# Altium PCB PCB.PcbDoc
Units mm, origin at the board's own origin, x right, y up, seen from the top; angles counter-clockwise.
Board outline 100 x 150 mm, 2 copper layers (Top Layer, Bottom Layer); 62 components, 49 nets, 227 pads, 0 vias.
Unrouted connection lines stored in the file: 11.
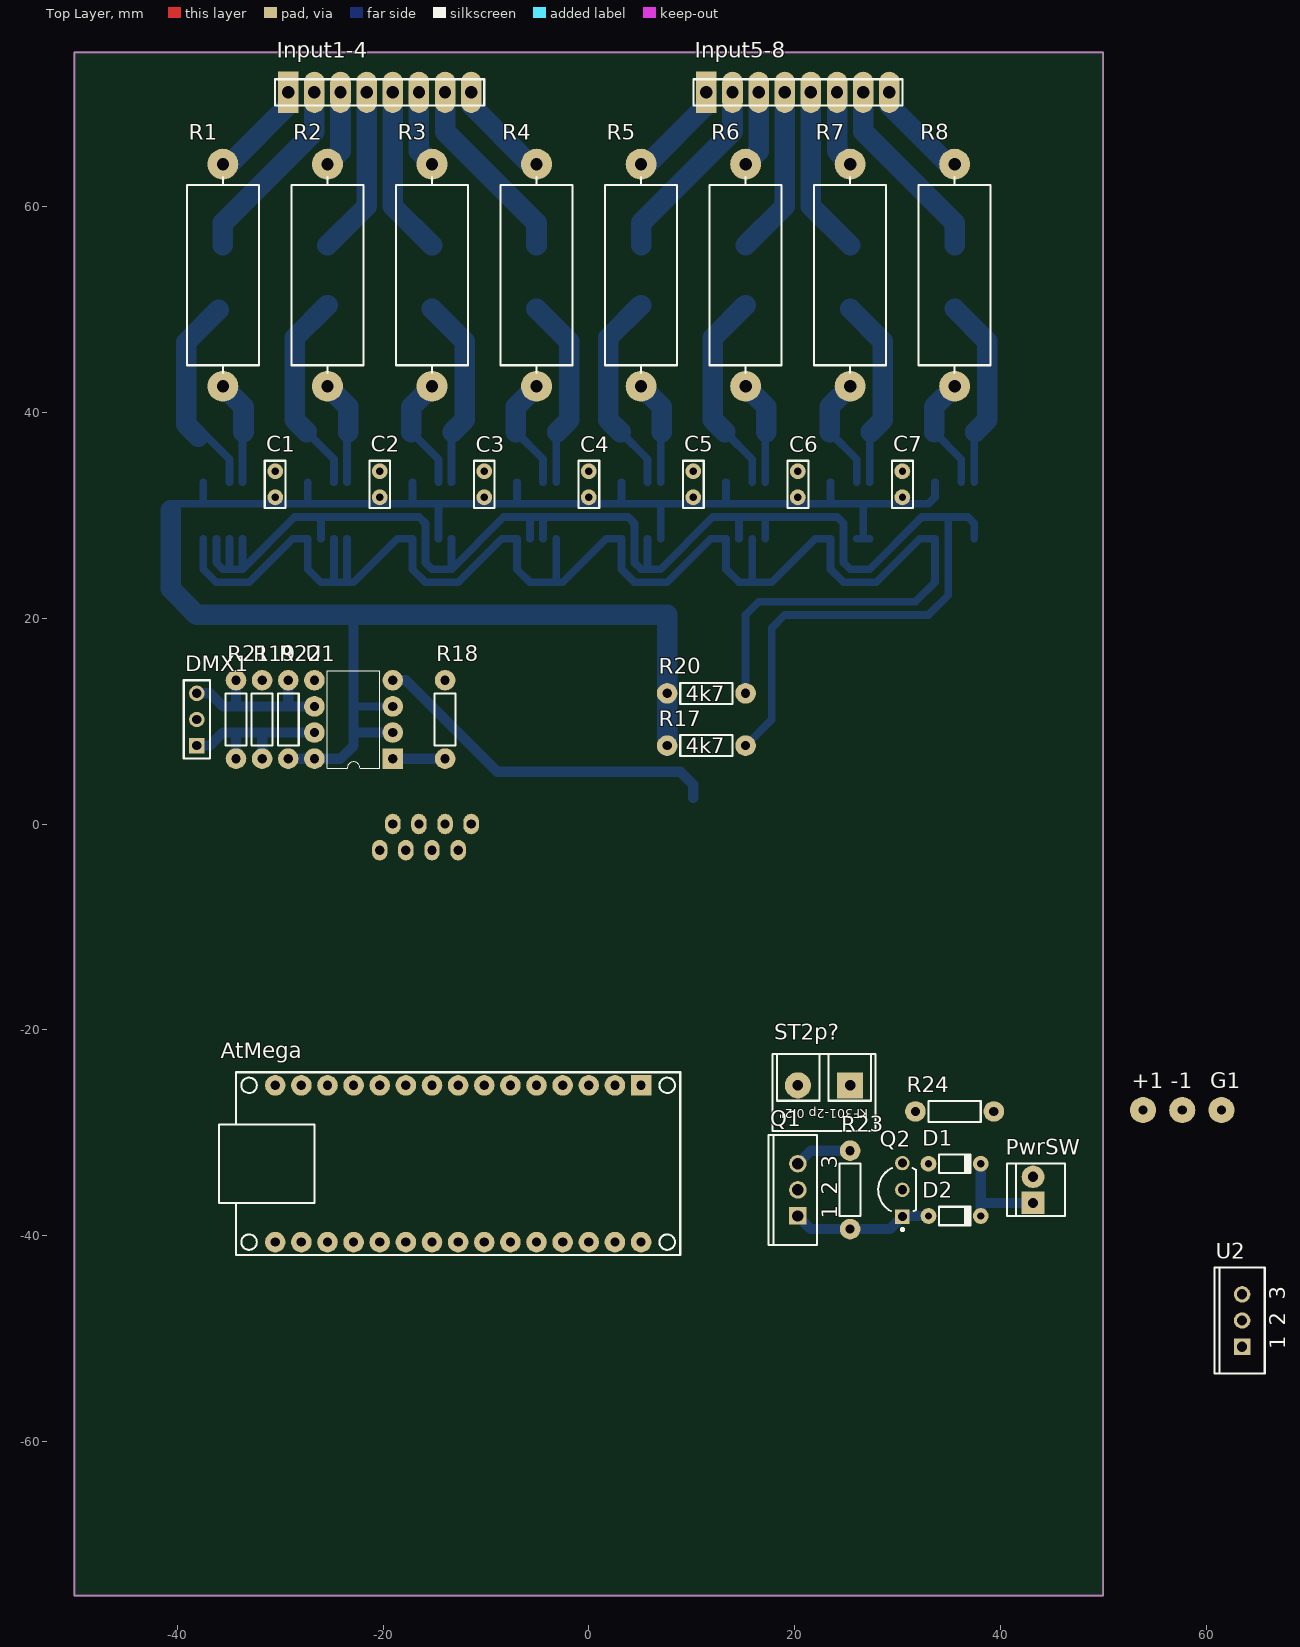
[diagram p0: Top Layer view]
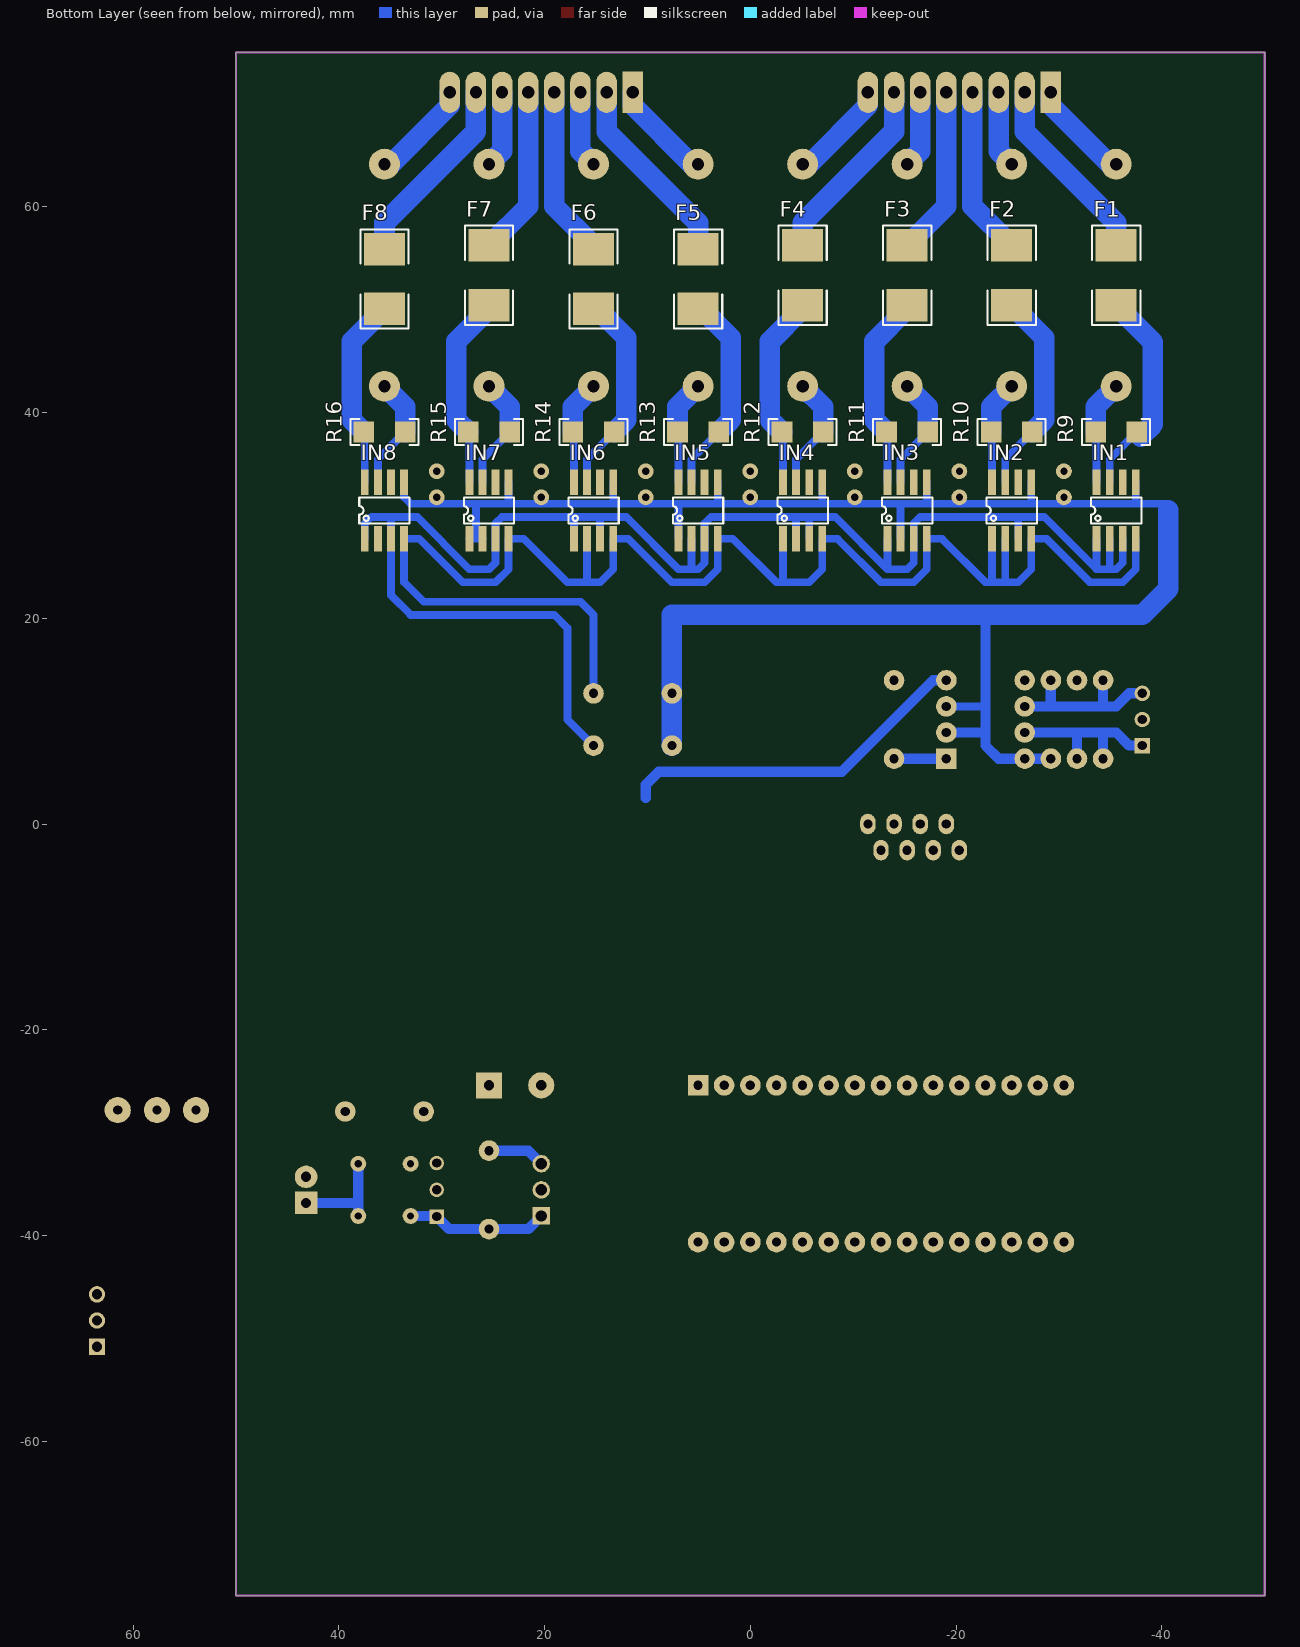
[diagram p1: Bottom Layer view, seen from below]

## Layer stack, top to bottom
Top Solder: solder mask 0.0102, Solder Resist, Dk 3.5
Top Layer: signal copper 0.0356
Dielectric 1: dielectric 0.32, FR-4, Dk 4.8
Bottom Layer: signal copper 0.0356
Bottom Solder: solder mask 0.0102, Solder Resist, Dk 3.5

## Board outline
-50,75 -50,-75 50,-75 50,75

## Design rules (kind name [scope] priority, off if disabled: settings)
BoardOutlineClearance [All] p1: gap=0 ignorepadtopadclearanceinfootprint=FALSE
Clearance [All] p1: gap=0.35 ignorepadtopadclearanceinfootprint=TRUE
ComponentClearance ComponentClearance_1 [(InPolygon AND InComponent('P1'))] p1: gap=0 collisioncheckmode=3 verticalgap=0.254 showdistances=FALSE
ComponentClearance [All] p2: gap=0 collisioncheckmode=3 verticalgap=0.254 showdistances=FALSE
HoleSize [All] p1: absolutevalues=TRUE maxlimit=3.81 minlimit=0.711 maxpercent=80.000 minpercent=20.000
HoleToHoleClearance [All] p1: gap=0.762 allowstackedmicrovias=TRUE
MinimumSolderMaskSliver [All] p1 off: minsoldermaskwidth=0.254
MinimumSolderMaskSliver SilkscreenOverComponentPads [All] p2 off: minsoldermaskwidth=0.254
PasteMaskExpansion [All] p1 off: expansion=0
PlaneConnect [All] p1: planeconnectstyle=Relief reliefexpansion=0.508 reliefentries=4 reliefconductorwidth=0.305 reliefairgap=0.254
PolygonConnect [All] p1: connectstyle=Relief reliefconductorwidth=0.5 reliefentries=4 polygonreliefangle="90 Angle" airgapwidth=0.254
RoutingVias [All] p1: holewidth=0.711 width=1.778 viastyle="Through Hole" minholewidth=0.711 minwidth=1.524 maxholewidth=0.991 maxwidth=2.54
SilkToSilkClearance [All] p1 off: silktosilkclearance=0.254
SolderMaskExpansion [All] p1 off: expansion=0.102
Width [All] p1: maxlimit=2.54 minlimit=0.254 preferedwidth=0.305
23 further rules are at their usual default settings.

## Classes and differential pairs
component class Main: +1 -1 AtMega D1 D2 DMX1 G1 PwrSW Q1 Q2 R17 R18 R19 R20 R21 R22 R23 R24 ST2p? U1 U2
component class INA219Input: C1 C2 C3 C4 C5 C6 C7 F1 F2 F3 F4 F5 F6 F7 F8 IN1 IN2 IN3 IN4 IN5 IN6 IN7 IN8 Input1-4 Input5-8 R1 R2 R3 R4 R5 R6 R7 R8 R9 R10 R11 R12 R13 R14 R15 R16

## Components (designator, comment, footprint, x,y, rotation, side; value= is the part's Value field where it differs from the comment)
+1 "Socket" PIN1 53.87,-27.81 r0 top
-1 "Socket" PIN1 57.68,-27.81 r0 top
AtMega "Arduino Nano" "Arduino Nano" -12.7,-33.02 r180 top
C1 "" "1\" ceramic Radial Cap" -30.48,33.02 r90 top
C2 "" "1\" ceramic Radial Cap" -20.32,33.02 r90 top
C3 "10nF" "1\" ceramic Radial Cap" -10.16,33.02 r90 top
C4 "" "1\" ceramic Radial Cap" 0,33.02 r90 top
C5 "" "1\" ceramic Radial Cap" 10.16,33.02 r90 top
C6 "" "1\" ceramic Radial Cap" 20.32,33.02 r90 top
C7 "10nF" "1\" ceramic Radial Cap" 30.48,33.02 r90 top
D1 "1N4148" "1N4148-AX0.2\"" 35.56,-33.02 r0 top
D2 "1N4148" "1N4148-AX0.2\"" 35.56,-38.1 r0 top
DMX1 "Header 3" HDR1X3 -38.1,7.62 r90 top
F1 "PTC 1812" "0ZCG PTC 1812" -35.56,53.34 r90 bottom
F2 "PTC 1812" "0ZCG PTC 1812" -25.4,53.34 r90 bottom
F3 "PTC 1812" "0ZCG PTC 1812" -15.24,53.34 r90 bottom
F4 "PTC 1812" "0ZCG PTC 1812" -5.08,53.34 r90 bottom
F5 "PTC 1812" "0ZCG PTC 1812" 5.08,52.98 r90 bottom
F6 "PTC 1812" "0ZCG PTC 1812" 15.24,52.98 r90 bottom
F7 "PTC 1812" "0ZCG PTC 1812" 25.4,53.34 r90 bottom
F8 "PTC 1812" "0ZCG PTC 1812" 35.56,52.98 r90 bottom
G1 "Socket" PIN1 61.49,-27.81 r0 top
IN1 "INA219" INA219-D-SOIC -35.56,30.48 r180 bottom
IN2 "INA219" INA219-D-SOIC -25.4,30.48 r180 bottom
IN3 "INA219" INA219-D-SOIC -15.24,30.48 r180 bottom
IN4 "INA219" INA219-D-SOIC -5.08,30.48 r180 bottom
IN5 "INA219" INA219-D-SOIC 5.08,30.48 r180 bottom
IN6 "INA219" INA219-D-SOIC 15.24,30.48 r180 bottom
IN7 "INA219" INA219-D-SOIC 25.4,30.48 r180 bottom
IN8 "INA219" INA219-D-SOIC 35.56,30.48 r180 bottom
Input1-4 "Header 8" HDR1X8 -29.21,71.12 r0 top
Input5-8 "Header 8" HDR1X8 11.43,71.12 r0 top
PwrSW "Molex kk 254 2p" "Molex kk 254 2p" 43.18,-35.56 r90 top
Q1 "SUP65P06-20" TO-220AB 20.32,-35.56 r90 top
Q2 "BC547BRL1G" ONSC-TO-92-3-29-11_AM_BL 30.48,-35.56 r90 top
R1 "20.4" "Axial 0.85 5W" -35.56,53.34 r90 top
R2 "20.4" "Axial 0.85 5W" -25.4,53.34 r90 top
R3 "20.4" "Axial 0.85 5W" -15.24,53.34 r90 top
R4 "20.4" "Axial 0.85 5W" -5.08,53.34 r90 top
R5 "20.4" "Axial 0.85 5W" 5.08,53.34 r90 top
R6 "20.4" "Axial 0.85 5W" 15.24,53.34 r90 top
R7 "20.4" "Axial 0.85 5W" 25.4,53.34 r90 top
R8 "20.4" "Axial 0.85 5W" 35.56,53.34 r90 top
R9 "0.33" "1206 SMD 1/4W" -35.56,38.1 r0 bottom
R10 "0.33" "1206 SMD 1/4W" -25.4,38.1 r0 bottom
R11 "0.33" "1206 SMD 1/4W" -15.24,38.1 r0 bottom
R12 "0.33" "1206 SMD 1/4W" -5.08,38.1 r0 bottom
R13 "0.33" "1206 SMD 1/4W" 5.08,38.1 r0 bottom
R14 "0.33" "1206 SMD 1/4W" 15.24,38.1 r0 bottom
R15 "0.33" "1206 SMD 1/4W" 25.4,38.1 r0 bottom
R16 "0.33" "1206 SMD 1/4W" 35.56,38.1 r0 bottom
R17 "4k7" "Axial 0.3\" 1/4W" 11.43,7.62 r180 top
R18 "10K" "Axial 0.3\" 1/4W" -13.97,10.16 r270 top
R19 "20K" "Axial 0.3\" 1/4W" -31.75,10.16 r90 top
R20 "4k7" "Axial 0.3\" 1/4W" 11.43,12.7 r180 top
R21 "120" "Axial 0.3\" 1/4W" -34.29,10.16 r270 top
R22 "20K" "Axial 0.3\" 1/4W" -29.21,10.16 r90 top
R23 "1M" "Axial 0.3\" 1/4W" 25.4,-35.56 r90 top
R24 "1M" "Axial 0.3\" 1/4W" 35.56,-27.94 r0 top
ST2p? "KF301-2p" "KF301-2p_0.2\"" 22.86,-25.4 r180 top
U1 "MAX485" DIP8 -22.86,10.16 r180 top
U2 "LM7815" 221A-04 63.5,-48.26 r90 top

## Footprints (in the part's own frame and the unit in brackets; to place one, negate y for a bottom-side part, rotate by r counter-clockwise, add the part's x,y. Pads: shape width x height; smd on the part's side, far side on the other; paste and mask are expansions set on the pad)
"0ZCG PTC 1812" [mm] "Bel Fuse PTC in 1812 package from the 0ZCG series"
  rect 3.15x4 smd: 1(-2.9,0) 2(2.9,0)
  silkscreen extent -4.82,-2.35 4.82,2.35
"1\" ceramic Radial Cap" [mm] "Capacitor ceramic 1\" Radial"
  round 1.54 hole 0.7: 1(-1.27,0) 2(1.27,0)
  silkscreen extent -2.29,-1.02 2.29,1.02
"1N4148-AX0.2\"" [mm] "1N4148 Diode Axial 0.2\""
  round 1.54 hole 0.7: 1(-2.54,0) 2(2.54,0)
  silkscreen extent -1.52,-0.9 1.55,0.9
221A-04 [mm]
  rect 1.6x1.6 hole 1: 1(-2.54,0)
  round 1.6 hole 1: 2(0,0) 3(2.54,0)
  silkscreen extent -5.15,-2.2 5.15,2.7
"1206 SMD 1/4W" [mm] "1206 SMD Resistor 1/4W for hand soldering"
  rect 2x2 smd: 1(-2,0) 2(2,0)
  silkscreen extent -3.3,-1.27 3.3,1.27, body extent -1.55,-0.77 1.55,0.78, height 0.55
"Arduino Nano" [mm] "Arduino Nano Version 3.0"
  rect 2x2 hole 0.9: 1(-17.78,-7.62)
  round 2 hole 0.9: 2(-15.24,-7.62) 3(-12.7,-7.62) 4(-10.16,-7.62) 5(-7.62,-7.62) 6(-5.08,-7.62) 7(-2.54,-7.62) 8(0,-7.62) 9(2.54,-7.62) 10(5.08,-7.62) 11(7.62,-7.62) 12(10.16,-7.62) 13(12.7,-7.62) 14(15.24,-7.62) 15(17.78,-7.62) 16(17.78,7.62) 17(15.24,7.62) 18(12.7,7.62) 19(10.16,7.62) 20(7.62,7.62) 21(5.08,7.62) 22(2.54,7.62) 23(0,7.62) 24(-2.54,7.62) 25(-5.08,7.62) 26(-7.62,7.62) 27(-10.16,7.62) 28(-12.7,7.62) 29(-15.24,7.62) 30(-17.78,7.62)
  silkscreen extent -21.59,-8.89 23.24,8.89, body extent -21.41,-8.93 21.59,8.87, height 13.74
"Axial 0.3\" 1/4W" [mm]
  round 2 hole 0.9: 1(-3.81,0) 2(3.81,0)
  silkscreen extent -2.54,-1.02 2.54,1.02, body extent -4.11,-1.12 4.11,1.13, height 2.18
"Axial 0.85 5W" [mm] "17,5x6,5mm 5W resistor with 0.85\" spacing"
  round 3 hole 1.2: 1(-10.795,0) 2(10.795,0)
  silkscreen extent -9.53,-3.5 9.53,3.5
DIP8 [mm]
  rect 2x2 hole 0.9: 1(-3.81,3.81)
  round 2 hole 0.9: 2(-3.81,1.27) 3(-3.81,-1.27) 4(-3.81,-3.81) 5(3.81,-3.81) 6(3.81,-1.27) 7(3.81,1.27) 8(3.81,3.81)
  silkscreen extent -2.54,-4.75 2.54,4.76
HDR1X3 [mm] "Connector; Header; 3 Position"
  rect 1.5x1.5 hole 0.9: 1(0,0)
  round 1.5 hole 0.9: 2(2.54,0) 3(5.08,0)
  silkscreen extent -1.27,-1.27 6.35,1.27
HDR1X8 [mm] "Connector; Header; 8 Position"
  rect 2x4 hole 1.2: 1(0,0)
  oval 2x4 hole 1.2: 2(2.54,0) 3(5.08,0) 4(7.62,0) 5(10.16,0) 6(12.7,0) 7(15.24,0) 8(17.78,0)
  silkscreen extent -1.27,-1.27 19.05,1.27
INA219-D-SOIC [mm] "INA219 Bidirectional Current Monitor With I2C"
  rect 0.75x2.5 smd: A0(-0.635,-2.75) A1(-1.905,-2.75) GND(0.635,2.75) IN+(-1.905,2.75) IN-(-0.635,2.75) SCL(1.905,-2.75) SDA(0.635,-2.75) Vs(1.905,2.75)
  silkscreen extent -2.45,-1.27 2.45,1.27, body extent -2.45,-2.99 2.45,2.99, height 1.56
"KF301-2p_0.2\"" [mm] "Screw terminal KF301-2p 0.2\" pitch 5.08mm"
  rect 2.54x2.54 hole 1: 1(-2.54,0)
  round 2.54 hole 1: 2(2.54,0)
  silkscreen extent -5,-3.05 5,4.45, body extent -5.09,-3.15 5.09,4.55, height 10.04
"Molex kk 254 2p" [mm] "Molex KK 254 2p"
  rect 2.2x2.2 hole 1: 1(-1.27,0)
  round 2.2 hole 1: 2(1.27,0)
  silkscreen extent -2.54,-3.1 2.54,2.55, body extent -2.54,-2.9 2.54,2.9, height 11.7
ONSC-TO-92-3-29-11_AM_BL [mm] "TO, 3-Leads, Body Dia 4.7mm, Pitch 2.6mm"
  rect 1.4x1.4 hole 0.9: 1(-2.6,0)
  round 1.4 hole 0.9: 2(0,0) 3(2.6,0)
  silkscreen extent -3.97,-1.34 2.13,2.35, body extent -2.84,-1.34 2.84,2.35, height 8.92
PIN1 [mm]
  round 2.54 hole 0.9: 1(0,0)
TO-220AB [mm] "TO, Thru-Hole, Vertical, Heatsink Mounted; 3 In-Line Leads; Pitch 2.54 mm"
  rect 1.7x1.7 hole 1.1: 1(-2.54,0)
  round 1.7 hole 1.1: 2(0,0) 3(2.54,0)
  silkscreen extent -5.35,-1.85 5.35,2.85

## Part data
C1 C2 C3 C4 C5 C6 C7: library part "1\" ceramic Radial Cap", "1\" ceramic Radial Cap"
DMX1: "Header, 3-Pin", LatestRevisionDate=17-Jul-2002, LatestRevisionNote="Re-released for DXP Platform.", Publisher="Altium Limited"
F1 F2 F3 F4 F5 F6 F7 F8: library part "PTC 1812 Bel Fuse"
IN1 IN2 IN3 IN4 IN5 IN6 IN7 IN8: library part INA219-D-SOIC
Input1-4 Input5-8: "Header, 8-Pin", LatestRevisionDate=17-Jul-2002, LatestRevisionNote="Re-released for DXP Platform.", Publisher="Altium Limited"
Q1: "P-Channel 60V (D-S), 175'C  MOSFET", Code_JEDEC=TO-220-AB-alt, ComponentLink1Description="Manufacturer Link", ComponentLink1URL=http://www.vishay.com/, ComponentLink2Description=Datasheet, ComponentLink2URL=http://www.vishay.com/docs/70289/70289.pdf, DatasheetVersion=24-Feb-1998, LatestRevisionDate=17-Jul-2002, LatestRevisionNote="Re-released for DXP Platform.", Note="Pin 2 (Drain) is connected to TAB", PackageDescription="TO, Thru-Hole, Vertical, Heatsink Mounted; 3 In-Line Leads; Pitch 2.54 mm", PackageReference=TO-220AB, Published=8-Jun-2000, Publisher="Altium Limited"
Q2: "Amplifier Transistor, NPN Silicon, 3-Pin TO-92, Pb-Free, Tape and Reel", Manufacturer="On Semiconductor", Supplier Part Number 1=BC547BRL1GOSTR-ND, ComponentLink1Description="Manufacturer URL", ComponentLink1URL=http://www.onsemi.com/, ComponentLink2Description=Datasheet, ComponentLink2URL=http://www.onsemi.com/pub_link/Collateral/BC546-D.PDF, ComponentLink3Description="Package Specification", ComponentLink3URL=http://www.onsemi.com/pub_link/Collateral/MAC97-D.PDF, DatasheetVersion="Rev. 7", fT Min (MHz)=150, IC Continuous (A)=0.1, Mounting Technology="Through Hole", PackageDescription="3-Pin Transistor Outline, Body 4.825 x 3.685 mm, Pitch 1.27 mm", PackageReference=TO-92-3-29-11_AM_BL, PackageVersion="Rev. AM", Packing="Tape and Reel", PartNumber=BC547BRL1G, Polarity=NPN, RoHS=TRUE, Supplier 1=Digi-Key, Supplier 2=Digi-Key, Supplier 3=Farnell, Supplier 4=Farnell, Supplier 5=Newark, Supplier 6=Mouser, Supplier Part Number 2=BC547BRL1GOSCT-ND, Supplier Part Number 3=2317853, Supplier Part Number 4=2317547, Supplier Part Number 5=26K3431, Supplier Part Number 6=863-BC547BRL1G
R1 R2 R3 R4 R5 R6 R7 R8: library part "Axial 0.85\" 5W"
R9 R10 R11 R12 R13 R14 R15 R16: library part "1206 SMD 1/4W"
R17 R18 R19 R20 R21 R22 R23 R24: library part "Axial 0.3\" 1/4W"
ST2p?: library part "KF301-2p_0.2\"", "Screw terminal KF301-2p 0.2\" pitch 5.08mm"
U1: library part "MAX845 DIP8"
U2: "3-Terminal Positive Fixed Voltage Regulator", Code_JEDEC=TO-262-AA, ComponentLink1Description="Manufacturer Link", ComponentLink1URL=http://www.onsemi.com/site/products/taxonomy/0,4438,503,00.html, DatasheetVersion=1988, Note="Heatsink surface connected to pin 2.", PackageDescription="TO, Thru-Hole, Vertical, Heatsink Mounted; 3 In-Line Leads; Pitch 2.54 mm", PackageReference=221A-04, Published=17-Jul-2002, Publisher="Altium Limited"
+1 -1 G1: LatestRevisionDate=17-Jul-2002, LatestRevisionNote="Re-released for DXP Platform.", Publisher="Altium Limited"

## Free pads (board coordinates)
  oval 1.5x2 hole 0.9: 1(-20.32,-2.54) 2(-19.05,0) 3(-17.78,-2.54) 4(-16.51,0) 5(-15.24,-2.54) 6(-13.97,0) 7(-12.7,-2.54) 8(-11.43,0)

## Nets (pads, with @x,y where several pads share a name; then routed paths per layer and width w, separated by ;. In a path a pad name is that pad's centre, name@x,y a point inside that pad or via, vN(x,y) a via of type N, cw(c..) or ccw(c..) an arc to the next point about the centre after c; other vN are vias at no path point)
5v: AtMega.27 C1.1 C2.1 C3.1 C4.1 C5.1 C6.1 C7.1 IN1.Vs IN2.Vs IN3.A0 IN3.Vs IN4.Vs IN5.A1 IN5.Vs IN6.Vs IN7.A0 IN7.A1 IN7.Vs IN8.Vs R17.2 R20.2 R22.1 R24.2 U1.2 U1.3 U1.8 U2.3 | length 199.8
  Bottom Layer w0.75: -40.64,30.48 -40.64,31.115 -37.465,31.115 ; IN1.Vs -37.465,31.115 ; IN2.Vs -27.305,31.115 ; -22.86,11.43 U1.3 ; IN3.Vs -17.145,31.115 ; IN3.A0 -14.605,31.115 ; IN4.Vs -6.985,31.115 ; IN5.Vs 3.175,31.115 ; IN5.A1 6.985,31.115 ; IN6.Vs 13.335,31.115 ; IN7.Vs 23.495,31.115 ; IN7.A0 26.88,27.73 ; IN7.A1 26.88,27.73 ; IN8.Vs 33.655,31.75 33.02,31.115 26.67,31.115 ; -37.465,31.115 -27.305,31.115 ; -27.305,31.115 -17.145,31.115 ; -17.145,31.115 -14.605,31.115 ; -14.605,31.115 -6.985,31.115 ; -6.985,31.115 3.175,31.115 ; 3.175,31.115 6.985,31.115 ; 6.985,31.115 13.335,31.115 ; 13.335,31.115 23.495,31.115 ; 23.495,31.115 26.67,31.115 ; 26.67,31.115 26.67,27.94 26.88,27.73
  Bottom Layer w1: R22.1 U1.8 -24.13,6.35 -22.86,7.62 -22.86,8.89 ; -22.86,20.32 -22.86,11.43 -22.86,8.89 ; U1.2 -22.86,8.89
  Bottom Layer w2: -40.64,30.48 -40.64,22.86 -38.1,20.32 -22.86,20.32 7.62,20.32 R20.2 R17.2
A: +1.1 DMX1.3 R21.1 R22.2 U1.6 | length 17
  Bottom Layer w1: DMX1.3 -36.83,12.7 -35.56,11.43 -34.29,11.43 ; R21.1 -34.29,11.43 ; R22.2 -29.21,11.43 ; U1.6 -29.21,11.43 ; -34.29,11.43 -29.21,11.43
B: -1.1 DMX1.1 R19.1 R21.2 U1.7 | length 17
  Bottom Layer w1: DMX1.1 -36.83,7.62 -35.56,8.89 -34.29,8.89 ; R21.2 -34.29,8.89 ; R19.1 -31.75,8.89 ; U1.7 -31.75,8.89 ; -34.29,8.89 -31.75,8.89
DI: AtMega.8 U1.4 | length 34.7
  Bottom Layer w1: U1.4 -17.78,13.97 -8.89,5.08 8.89,5.08 10.16,3.81 10.16,2.54
GND: AtMega.4 AtMega.29 C1.2 C2.2 C3.2 C4.2 C5.2 C6.2 C7.2 DMX1.2 G1.1 IN1.GND IN2.GND IN3.GND IN4.GND IN5.GND IN6.GND IN7.GND IN8.A0 IN8.GND PwrSW.2 Q2.3 R18.1 R19.2 ST2p?.1 U1.5 U2.2
NetAtMega_5: AtMega.5
NetAtMega_6: AtMega.6
NetAtMega_7: AtMega.7
NetD1_1: D1.1 R24.1
NetD1_2: D1.2 D2.2 PwrSW.1 | length 10.2
  Bottom Layer w1: D2.2 38.1,-36.83 ; D1.2 38.1,-36.83 ; PwrSW.1 38.1,-36.83
NetD2_1: D2.1 Q1.1 Q2.1 R23.1 | length 13.8
  Bottom Layer w1: Q1.1 21.59,-39.37 R23.1 29.27,-39.37 Q2.1 30.54,-38.1 D2.1
NetF1_1: F1.1 IN1.IN- R9.1 | length 20.1
  Bottom Layer w0.75: R9.1 -34.925,35.465 IN1.IN-
  Bottom Layer w2: R9.1@-37.96,37.66 -39.135,38.835 -39.135,46.825 F1.1@-35.96,50
NetF1_2: F1.2 Input1-4.2 | length 18.6
  Bottom Layer w2: F1.2 -35.56,58.42 -26.67,67.31 Input1-4.2
NetF2_1: F2.1 IN2.IN- R10.1 | length 20.1
  Bottom Layer w0.75: R10.1 -24.765,35.465 IN2.IN-
  Bottom Layer w2: R10.1 -28.575,39.275 -28.575,47.265 F2.1
NetF2_2: F2.2 Input1-4.4 | length 16.5
  Bottom Layer w2: F2.2 -21.59,60.05 Input1-4.4
NetF3_1: F3.1 IN3.IN+ R11.2 | length 18.7
  Bottom Layer w0.75: IN3.IN+ -13.335,38.005 R11.2
  Bottom Layer w2: F3.1@-15.24,50.08 -12.065,46.905 -12.065,39.275 R11.2
NetF3_2: F3.2 Input1-4.5 | length 16.5
  Bottom Layer w2: Input1-4.5 -19.05,60.05 F3.2
NetF4_1: F4.1 IN4.IN+ R12.2 | length 18.7
  Bottom Layer w0.75: IN4.IN+ -3.175,38.005 R12.2
  Bottom Layer w2: F4.1@-5.08,50.08 -1.905,46.905 -1.905,39.275 R12.2
NetF4_2: F4.2 Input1-4.7 | length 18.6
  Bottom Layer w2: Input1-4.7 -13.97,67.31 -5.08,58.42 F4.2
NetF5_1: F5.1 IN5.IN- R13.1 | length 20.1
  Bottom Layer w0.75: R13.1 5.715,35.465 IN5.IN-
  Bottom Layer w2: R13.1 1.905,39.275 1.905,47.265 F5.1@5.08,50.44
NetF5_2: F5.2 Input5-8.2 | length 18.6
  Bottom Layer w2: F5.2@5.08,56.24 5.08,58.42 13.97,67.31 Input5-8.2
NetF6_1: F6.1 IN6.IN- R14.1 | length 20.1
  Bottom Layer w0.75: R14.1 15.875,35.465 IN6.IN-
  Bottom Layer w2: R14.1 12.065,39.275 12.065,47.265 F6.1@15.24,50.44
NetF6_2: F6.2 Input5-8.4 | length 16.5
  Bottom Layer w2: F6.2@15.24,56.24 19.05,60.05 Input5-8.4
NetF7_1: F7.1 IN7.IN+ R15.2 | length 18.7
  Bottom Layer w0.75: IN7.IN+ 27.305,38.005 R15.2
  Bottom Layer w2: F7.1@25.4,50.08 28.575,46.905 28.575,39.275 R15.2
NetF7_2: F7.2 Input5-8.5 | length 16.5
  Bottom Layer w2: Input5-8.5 21.59,60.05 F7.2
NetF8_1: F8.1 IN8.IN+ R16.2 | length 18.7
  Bottom Layer w0.75: IN8.IN+ 37.465,38.005 R16.2
  Bottom Layer w2: F8.1 38.735,46.905 38.735,39.275 R16.2
NetF8_2: F8.2 Input5-8.7 | length 18.6
  Bottom Layer w2: Input5-8.7 26.67,67.31 35.56,58.42 F8.2@35.56,56.24
NetIN1_IN+: IN1.IN+ R1.1 R9.2 | length 10.2
  Bottom Layer w0.75: IN1.IN+ -33.655,38.005 R9.2
  Bottom Layer w2: R1.1 -33.56,40.545 R9.2
NetIN2_IN+: IN2.IN+ R2.1 R10.2 | length 10.2
  Bottom Layer w0.75: IN2.IN+ -23.495,38.005 R10.2
  Bottom Layer w2: R2.1 -23.4,40.545 R10.2
NetIN3_IN-: IN3.IN- R3.1 R11.1 | length 11.2
  Bottom Layer w0.75: R11.1 -14.605,35.465 IN3.IN-
  Bottom Layer w2: R11.1 -17.24,40.545 R3.1
NetIN4_IN-: IN4.IN- R4.1 R12.1 | length 11.2
  Bottom Layer w0.75: R12.1 -4.445,35.465 IN4.IN-
  Bottom Layer w2: R12.1 -7.08,40.545 R4.1
NetIN5_IN+: IN5.IN+ R5.1 R13.2 | length 10.2
  Bottom Layer w0.75: IN5.IN+ 6.985,38.005 R13.2
  Bottom Layer w2: R5.1 7.08,40.545 R13.2
NetIN6_IN+: IN6.IN+ R6.1 R14.2 | length 10.2
  Bottom Layer w0.75: IN6.IN+ 17.145,38.005 R14.2
  Bottom Layer w2: R6.1 17.24,40.545 R14.2
NetIN7_IN-: IN7.IN- R7.1 R15.1 | length 11.2
  Bottom Layer w0.75: R15.1 26.035,35.465 IN7.IN-
  Bottom Layer w2: R15.1 23.4,40.545 R7.1
NetIN8_IN-: IN8.IN- R8.1 R16.1 | length 11.2
  Bottom Layer w0.75: R16.1 36.195,35.465 IN8.IN-
  Bottom Layer w2: R16.1 33.56,40.545 R8.1
NetInput1-4_1: Input1-4.1 R1.2 | length 10
  Bottom Layer w2: R1.2 -34.925,64.135 -29.21,69.85 Input1-4.1
NetInput1-4_3: Input1-4.3 R2.2 | length 7.5
  Bottom Layer w2: R2.2 -24.13,65.405 Input1-4.3
NetInput1-4_6: Input1-4.6 R3.2 | length 7.5
  Bottom Layer w2: Input1-4.6 -16.51,65.405 R3.2
NetInput1-4_8: Input1-4.8 R4.2 | length 10
  Bottom Layer w2: Input1-4.8 -11.43,69.85 -5.715,64.135 R4.2
NetInput5-8_1: Input5-8.1 R5.2 | length 10
  Bottom Layer w2: R5.2 5.715,64.135 11.43,69.85 Input5-8.1
NetInput5-8_3: Input5-8.3 R6.2 | length 7.5
  Bottom Layer w2: R6.2 16.51,65.405 Input5-8.3
NetInput5-8_6: Input5-8.6 R7.2 | length 7.5
  Bottom Layer w2: Input5-8.6 24.13,65.405 R7.2
NetInput5-8_8: Input5-8.8 R8.2 | length 10
  Bottom Layer w2: Input5-8.8 29.21,69.85 34.925,64.135 R8.2
NetQ1_2: Q1.2 U2.1
NetQ2_2: Q2.2
NetR18_2: R18.2 U1.1 | length 5.1
  Bottom Layer w1: U1.1 R18.2
SCL: AtMega.24 IN1.SCL IN2.A0 IN2.A1 IN2.SCL IN3.SCL IN4.A1 IN4.SCL IN5.SCL IN6.A0 IN6.SCL IN7.SCL IN8.SCL R20.1 | length 156.4
  Bottom Layer w0.75: IN1.SCL -37.465,24.765 -36.195,23.495 -33.02,23.495 -28.785,27.73 IN2.SCL -27.305,24.765 -26.035,23.495 -24.765,23.495 ; IN2.A0 -24.765,23.495 ; IN2.A1 -23.495,23.495 ; IN4.A1 -3.175,23.495 ; R20.1 15.24,20.32 16.51,21.59 31.75,21.59 33.655,23.495 IN8.SCL 32.175,27.73 27.94,23.495 24.765,23.495 23.495,24.765 IN7.SCL 22.015,27.73 17.78,23.495 15.875,23.495 ; IN6.A0 15.875,23.495 ; -24.765,23.495 -23.495,23.495 ; -23.495,23.495 -22.86,23.495 -18.625,27.73 IN3.SCL -17.145,24.765 -15.875,23.495 -12.7,23.495 -8.465,27.73 IN4.SCL -6.985,24.765 -5.715,23.495 -3.175,23.495 ; -3.175,23.495 -2.54,23.495 1.695,27.73 IN5.SCL 3.175,24.765 4.445,23.495 7.62,23.495 11.855,27.73 IN6.SCL 13.335,24.765 14.605,23.495 15.875,23.495
SDA: AtMega.23 IN1.A0 IN1.A1 IN1.SDA IN2.SDA IN3.A1 IN3.SDA IN4.A0 IN4.SDA IN5.A0 IN5.SDA IN6.A1 IN6.SDA IN7.SDA IN8.A1 IN8.SDA R17.1 | length 160.4
  Bottom Layer w0.75: IN1.SDA -36.195,25.4 -35.56,24.765 -34.925,24.765 ; IN1.A0 -34.925,24.765 ; IN1.A1 -33.655,24.765 ; IN2.SDA -26.035,29.845 ; IN3.A1 -13.335,24.765 ; IN4.SDA -5.715,29.845 ; IN4.A0 -4.445,29.845 ; IN5.A0 5.715,24.765 ; IN6.SDA 14.605,29.845 ; R17.1 17.78,10.16 17.78,19.05 19.05,20.32 33.02,20.32 34.925,22.225 IN8.SDA 34.925,29.845 ; IN6.A1 17.145,29.845 ; IN8.A1 37.465,29.21 36.83,29.845 34.925,29.845 ; -34.925,24.765 -33.655,24.765 ; -33.655,24.765 -28.575,29.845 -26.035,29.845 ; -26.035,29.845 -16.51,29.845 -15.875,29.21 IN3.SDA -15.875,25.4 -15.24,24.765 -13.335,24.765 ; -13.335,24.765 -8.255,29.845 -5.715,29.845 ; -5.715,29.845 -4.445,29.845 ; -4.445,29.845 3.81,29.845 4.445,29.21 IN5.SDA 4.445,25.4 5.08,24.765 5.715,24.765 ; 5.715,24.765 6.985,24.765 12.065,29.845 14.605,29.845 ; 14.605,29.845 17.145,29.845 ; 17.145,29.845 24.13,29.845 24.765,29.21 IN7.SDA 24.765,25.4 25.4,24.765 27.305,24.765 32.385,29.845 34.925,29.845
VCC: Q1.3 R23.2 ST2p?.2 | length 5.6
  Bottom Layer w1: Q1.3 21.59,-31.75 R23.2
pads on no net: AtMega.1 AtMega.2 AtMega.3 AtMega.9 AtMega.10 AtMega.11 AtMega.12 AtMega.13 AtMega.14 AtMega.15 AtMega.16 AtMega.17 AtMega.18 AtMega.19 AtMega.20 AtMega.21 AtMega.22 AtMega.25 AtMega.26 AtMega.28 AtMega.30

## Polygon pours and split planes (outlines as drawn)
GND on Bottom Layer "GND" (solid, shelved, pour order 0): -50,-75 50,-75 50,75 -50,75

## Keep-outs
Keep-Out Layer:
  the board outline again, w0.2

## Text inside footprints (layer, text, board x,y; h text height)
Q1: Top Overlay "3" at 24.145,-33.52 h1.5 r90; Top Overlay "2" at 24.145,-36.06 h1.5 r90; Top Overlay "1" at 24.145,-38.35 h1.5 r90
ST2p?: Top Overlay "KF301-2p 0.2\"" at 27.178,-27.432 h1.52 r180
U2: Top Overlay "3" at 67.675,-46.22 h1.5 r90; Top Overlay "2" at 67.675,-48.76 h1.5 r90; Top Overlay "1" at 67.675,-51.05 h1.5 r90